# Altium PCB Altium_PCB_Layout_ThinkClamp_v0.6.1_tpreset.PcbDoc
Units mil, origin at the board's own origin, x right, y up, seen from the top; angles counter-clockwise.
Board outline 1968.5 x 1968.5 mil, 2 copper layers (Top Layer, Bottom Layer); 38 components, 52 nets, 223 pads, 32 vias.
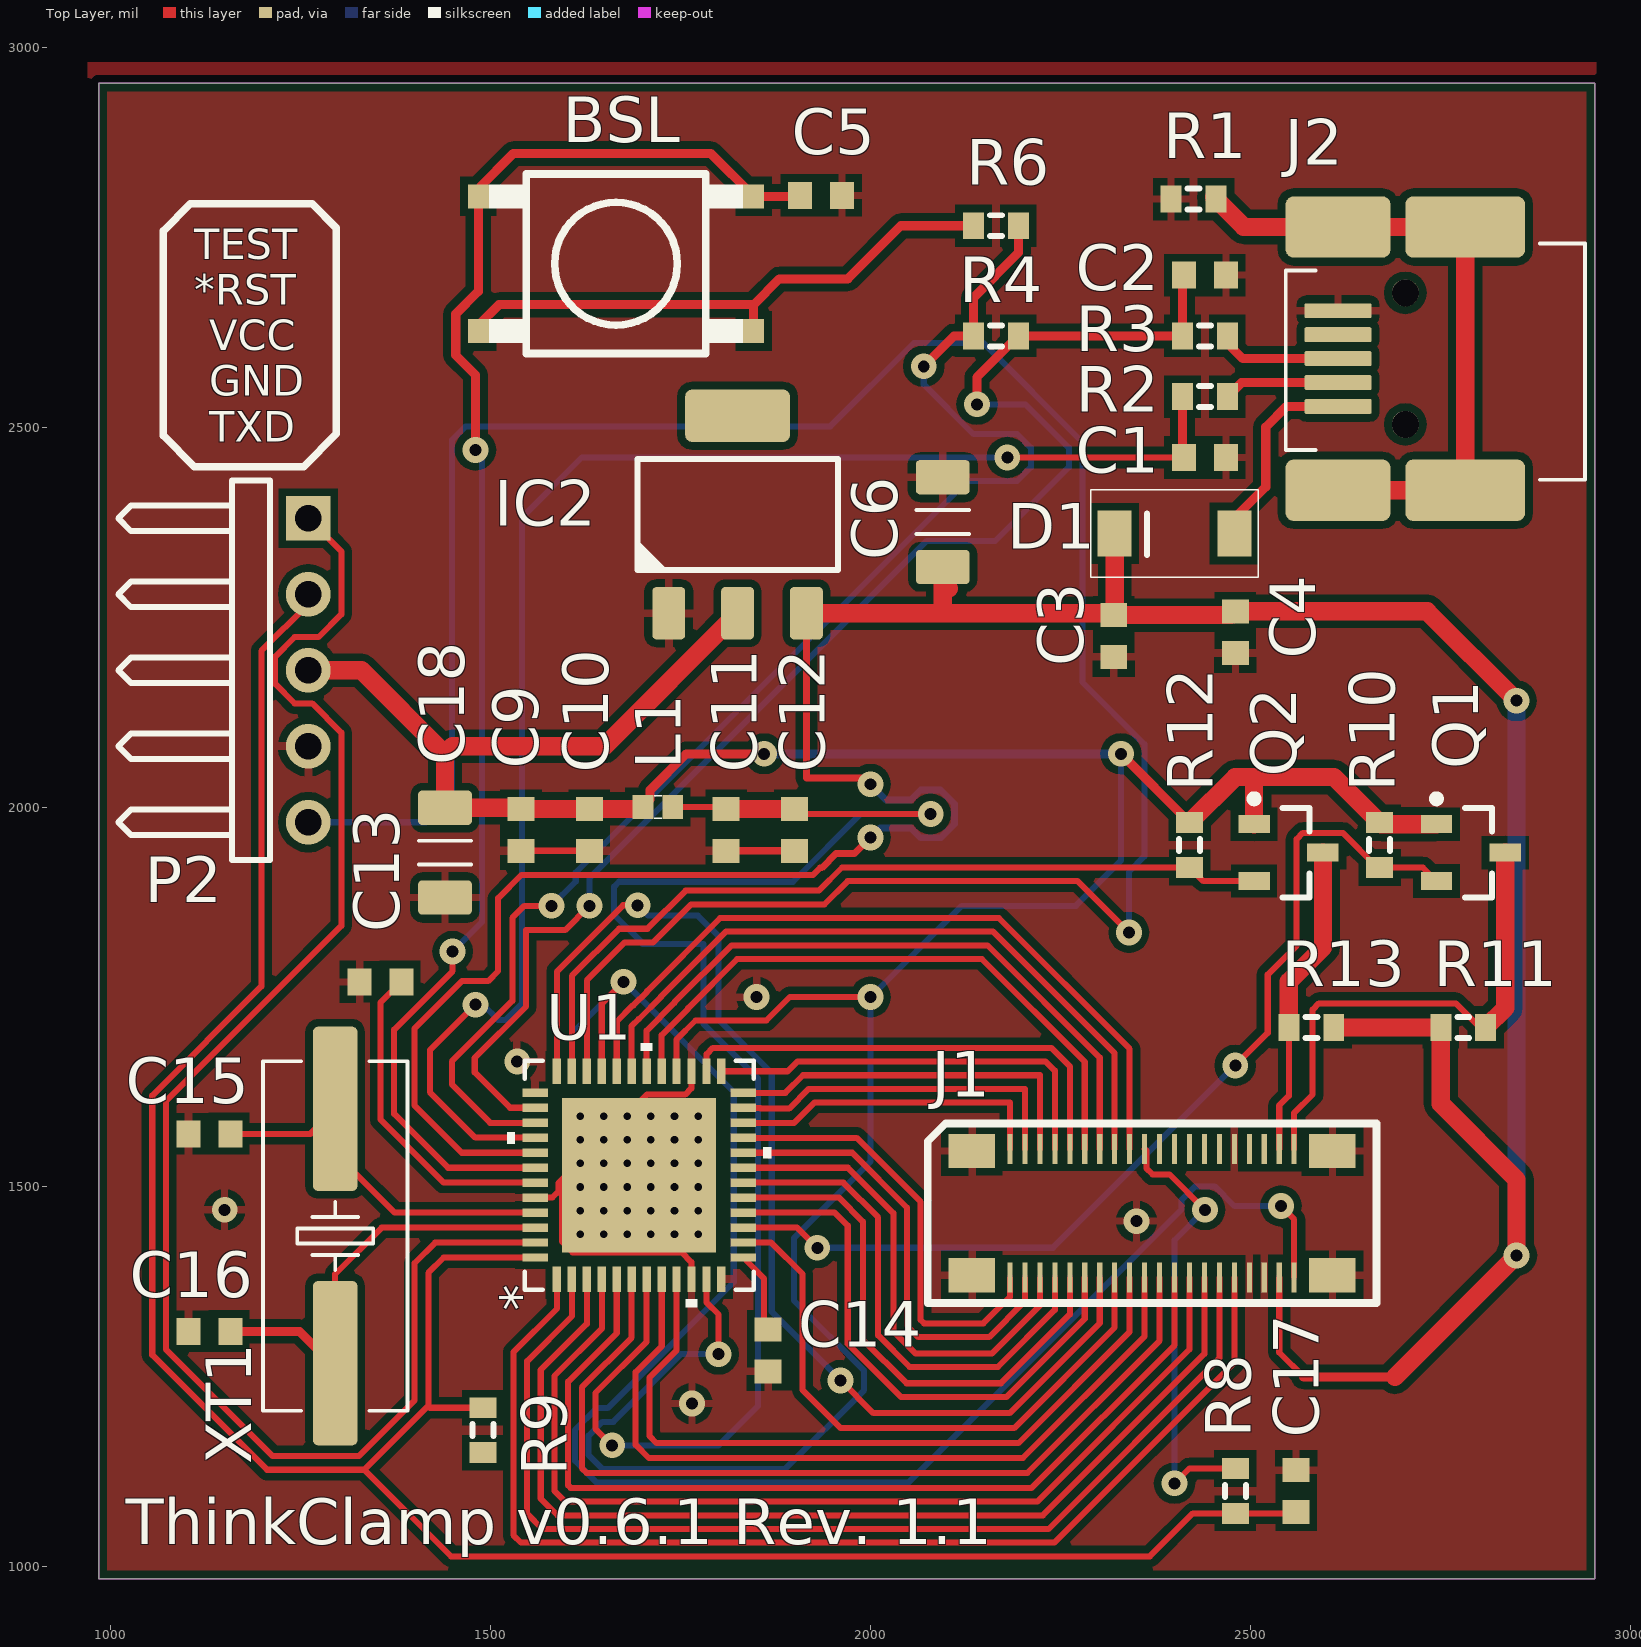
[diagram p0: Top Layer view]
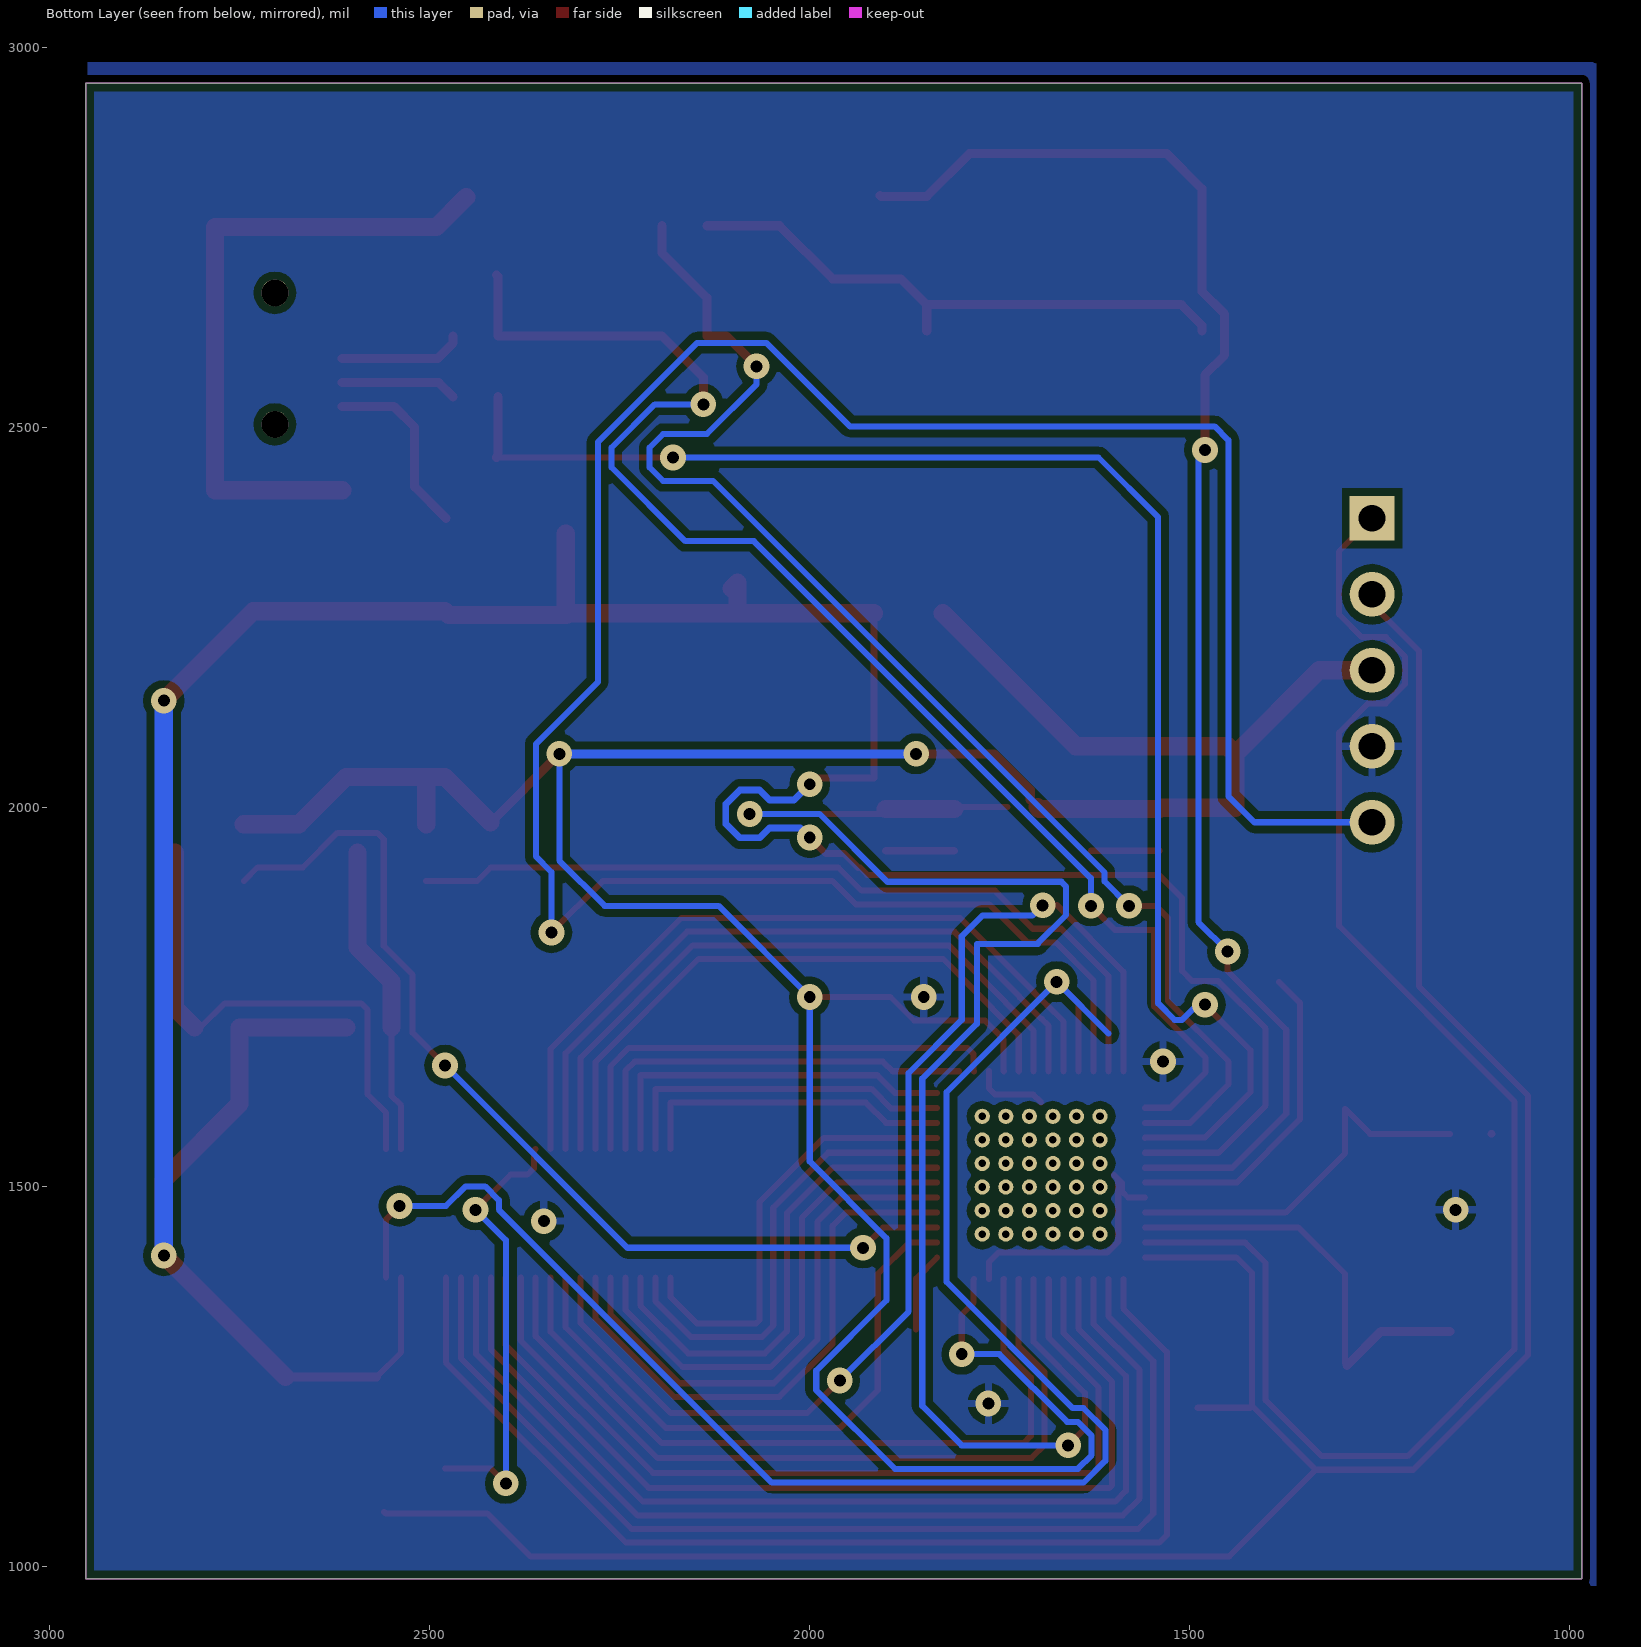
[diagram p1: Bottom Layer view, seen from below]

## Layer stack, top to bottom
Top Layer: signal copper 1.4
Dielectric: dielectric 12.6, FR-4, Dk 4.8
Bottom Layer: signal copper 1.4

## Board outline
984.25,984.25 984.25,2952.76 2952.76,2952.76 2952.76,984.25 2952.76,2952.76 984.25,2952.76 2952.76,2952.76 2952.76,984.25

## Design rules (kind name [scope] priority, off if disabled: settings)
Clearance "Clearance MSP430F5502" [HasFootprint('RGZ48_5P15X5P15') vs HasFootprint('RGZ48_5P15X5P15')] p1: gap=5
Clearance [All] p2: gap=10
PolygonConnect [All] p1: connectstyle=Relief reliefconductorwidth=10 reliefentries=4 polygonreliefangle="90 Angle" airgapwidth=10
RoutingVias [All] p1: holewidth=15.75 width=33.86 viastyle="Through Hole" minholewidth=15 minwidth=30 maxholewidth=28 maxwidth=50
ShortCircuit ShortCircuit_epad [InNet('EPAD') And OnLayer('Multi-Layer') vs InNet('EPAD') And OnLayer('Multi-Layer')] p1: allowed=TRUE
ShortCircuit [All] p2: allowed=FALSE
SolderMaskExpansion [All] p1: expansion=4
Width GND [InNet('GND')] p1: maxlimit=10 minlimit=8 preferedwidth=10
Width VCC [InNet('VCC')] p2: maxlimit=10 minlimit=10 preferedwidth=10
Width [All] p3: maxlimit=24 minlimit=8 preferedwidth=8
27 further rules are at their usual default settings.

## Components (designator, comment, footprint, x,y, rotation, side; value= is the part's Value field where it differs from the comment)
BSL "TL3301" TL3301 1665,2715 r180 top
C1 "Cap Semi" 1608[0603] 2440,2460 r180 top
C2 "Cap Semi" 1608[0603] 2440,2700 r180 top
C3 "Cap Semi" 1608[0603] 2320,2225 r270 top
C4 "Cap Semi" 1608[0603] 2480,2230 r270 top
C5 "Cap Semi" 1608[0603] 1935,2805 r180 top
C6 "approved sub OK" CAPC3216X180N 2095,2375 r90 top
C9 "Cap Semi" 1608[0603] 1540,1970 r90 top
C10 "Cap Semi" 1608[0603] 1630,1970 r90 top
C11 "Cap Semi" 1608[0603] 1810,1970 r90 top
C12 "Cap Semi" 1608[0603] 1900,1970 r90 top
C13 "Cap Semi" 1608[0603] 1355,1770 r180 top
C14 "Cap Semi" 1608[0603] 1865,1285 r270 top
C15 "Cap Semi" 1608[0603] 1130,1570 r0 top
C16 "Cap Semi" 1608[0603] 1130,1310 r0 top
C17 "Cap Semi" 1608[0603] 2560,1100 r90 top
C18 "approved sub OK" CAPC3216X180N 1440,1940 r270 top
D1 "B140-13-F" SMA 2400,2360 r180 top
IC2 "RT9164A LDO" SOT223 1825,2385 r90 top
J1 "AA01B-S040VA1" AA01B-S040VA1 2370.5,1465.5 r0 top
J2 "USB_MINI_5P" USB_Mini-B_Molex_SMT 2940,2785 r180 top
L1 "BK1608HM121-T" BK1608HM121-T 1720,2000 r0 top
P2 "Header 5H" HDR1X5H 1260,2380 r270 top
Q1 "BSS138N" INF-PG-SOT23_N 2790,1940 r0 top
Q2 "BSS138N" INF-PG-SOT23_N 2550,1940 r0 top
R1 "Res3" J1-0603 2425,2800 r0 top
R2 "Res3" J1-0603 2440,2540 r180 top
R3 "Res3" J1-0603 2440,2620 r180 top
R4 "Res3" J1-0603 2165,2620 r180 top
R6 "Res3" J1-0603 2165,2765 r0 top
R8 "Res3" J1-0603 2480,1100 r270 top
R9 "Res3" J1-0603 1490,1180 r270 top
R10 "Res3" J1-0603 2670,1950 r90 top
R11 "Res3" J1-0603 2780,1710 r180 top
R12 "Res3" J1-0603 2420,1950 r90 top
R13 "Res3" J1-0603 2580,1710 r0 top
U1 "MSP430F5502IRGZR" RGZ48_5P15X5P15 1695.5,1515.5 r90 top
XT1 "4.00MHz" CRYSTAL_HC49-US-SM 1295.5,1435.5 r270 top

## Footprints (in the part's own frame and the unit in brackets; to place one, negate y for a bottom-side part, rotate by r counter-clockwise, add the part's x,y. Pads: shape width x height; smd on the part's side, far side on the other; paste and mask are expansions set on the pad)
1608[0603] [mm] "Chip Capacitor, Body 1.6x0.8mm, IPC High Density"
  rect 0.8x0.9 smd: 1(-0.7,0) 2(0.7,0)
  body extent -0.87,-0.48 0.87,0.48, height 1.3
AA01B-S040VA1 [mm]
  rect 0.17x1 smd: 1(-4.75,2.15) 2(-4.75,-2.15) 3(-4.25,2.15) 4(-4.25,-2.15) 5(-3.75,2.15) 6(-3.75,-2.15) 7(-3.25,2.15) 8(-3.25,-2.15) 9(-2.75,2.15) 10(-2.75,-2.15) 11(-2.25,2.15) 12(-2.25,-2.15) 13(-1.75,2.15) 14(-1.75,-2.15) 15(-1.25,2.15) 16(-1.25,-2.15) 17(-0.75,2.15) 18(-0.75,-2.15) 19(-0.25,2.15) 20(-0.25,-2.15) 21(0.25,2.15) 22(0.25,-2.15) 23(0.75,2.15) 24(0.75,-2.15) 25(1.25,2.15) 26(1.25,-2.15) 27(1.75,2.15) 28(1.75,-2.15) 29(2.25,2.15) 30(2.25,-2.15) 31(2.75,2.15) 32(2.75,-2.15) 33(3.25,2.15) 34(3.25,-2.15) 35(3.75,2.15) 36(3.75,-2.15) 37(4.25,2.15) 38(4.25,-2.15) 39(4.75,2.15) 40(4.75,-2.15)
  rect 1.55x1.14 smd: 41(-6.025,2.075) 42(-6.025,-2.075) 43(6.025,2.075) 44(6.025,-2.075)
  silkscreen extent -7.5,-3 7.5,3
BK1608HM121-T [mm]
  rect 0.7x0.8 smd: 1(-0.5,0) 2(0.5,0)
  silkscreen extent -0.13,-0.38 0.13,0.38
CAPC3216X180N [mm] "Chip Capacitor, Body 3.2x1.6mm, 1.8mm H, EIA 1206, IPC Medium Density"
  round 0.508 on Mech15: 0(0,0)
  rrect25% 1.15x1.8 smd: 1(-1.5,0) 2(1.5,0)
  silkscreen extent -0.4,-0.88 0.4,0.88, body extent -1.7,-0.9 1.7,0.9, height 1.8
CRYSTAL_HC49-US-SM [mm] "SMD Crystal HC49/US-SM package"
  round 0.508 on Mech15: 0(0,0)
  rrect25% 5.5x1.5 smd: 1(-4.25,0) 2(4.25,0)
  silkscreen extent -5.84,-2.41 5.84,2.41, body extent -6.4,-2.41 6.4,2.42, height 4.29
HDR1X5H [mm] "Connector; Header; 5 Position; Right Angle"
  rect 1.5x1.5 hole 0.9: 1(0,0)
  round 1.5 hole 0.9: 2(2.54,0) 3(5.08,0) 4(7.62,0) 5(10.16,0)
  silkscreen extent -1.27,-6.35 11.43,-1.27
INF-PG-SOT23_N [mm] "SOT23, 3-Leads, Body 2.9x1.3mm, Pitch 0.95mm, IPC Medium Density"
  rect 1.05x0.6 smd: 1(-1.15,0.95) 2(-1.15,-0.95) 3(1.15,0)
  silkscreen extent -1.27,-1.5 0.7,1.92, body extent -0.7,-1.5 0.7,1.5, height 1.1
J1-0603 [mm] "Chip Resistor, Body 1.6x0.8mm, IPC High Density"
  rect 0.7x0.9 smd: 1(-0.75,0) 2(0.75,0)
  silkscreen extent -0.2,-0.35 0.2,0.35, body extent -0.85,-0.48 0.85,0.48, height 0.9
RGZ48_5P15X5P15 [mil]
  rect 33.46x11.02 smd paste-5.51: 1(-136.81,108.27) 2(-136.81,88.58) 3(-136.81,68.9) 4(-136.81,49.21) 5(-136.81,29.53) 6(-136.81,9.84) 7(-136.81,-9.84) 8(-136.81,-29.53) 9(-136.81,-49.21) 10(-136.81,-68.9) 11(-136.81,-88.58) 12(-136.81,-108.27) 25(136.81,-108.27) 26(136.81,-88.58) 27(136.81,-68.9) 28(136.81,-49.21) 29(136.81,-29.53) 30(136.81,-9.84) 31(136.81,9.84) 32(136.81,29.53) 33(136.81,49.21) 34(136.81,68.9) 35(136.81,88.58) 36(136.81,108.27)
  rect 11.02x33.46 smd paste-5.51: 13(-108.3,-136.81) 14(-88.61,-136.81) 15(-68.91,-136.81) 16(-49.22,-136.81) 17(-29.54,-136.81) 18(-9.85,-136.81) 19(9.85,-136.81) 20(29.54,-136.81) 21(49.22,-136.81) 22(68.91,-136.81) 23(88.61,-136.81) 24(108.3,-136.81) 37(108.3,136.81) 38(88.61,136.81) 39(68.91,136.81) 40(49.22,136.81) 41(29.54,136.81) 42(9.85,136.81) 43(-9.85,136.81) 44(-29.54,136.81) 45(-49.22,136.81) 46(-68.91,136.81) 47(-88.61,136.81) 48(-108.3,136.81)
  rect 202.76x202.76 smd paste-100.88 mask-101: 49(0,0)
  round 20 / inner round 60 / far side round 20 hole 10: V(77.5,77.5) V_2(-77.5,-46.5) V_3(-77.5,-77.5) V_4(-77.5,-15.5) V_5(-77.5,15.5) V_6(-77.5,46.5) V_7(-77.5,77.5) V_8(-46.5,-77.5) V_9(-46.5,-46.5) V_10(-46.5,-15.5) V_11(-46.5,15.5) V_12(-46.5,46.5) V_13(-46.5,77.5) V_14(-15.5,-77.5) V_15(-15.5,-46.5) V_16(-15.5,-15.5) V_17(-15.5,15.5) V_18(-15.5,46.5) V_19(-15.5,77.5) V_20(15.5,-77.5) V_21(15.5,-46.5) V_22(15.5,-15.5) V_23(15.5,15.5) V_24(15.5,46.5) V_25(15.5,77.5) V_26(46.5,-77.5) V_27(46.5,-46.5) V_28(46.5,-15.5) V_29(46.5,15.5) V_30(46.5,46.5) V_31(46.5,77.5) V_32(77.5,-77.5) V_33(77.5,-46.5) V_34(77.5,-15.5) V_35(77.5,15.5) V_36(77.5,46.5)
  silkscreen extent -174,-174 174,174
SMA [mm]
  rect 1.14x1.55 smd: 1(-2,0) 2(2,0)
  silkscreen extent -2.8,-1.46 2.8,1.46
SOT223 [mm] "SOT223 /SC-73"
  round 1 on Mech15: 0(0,0)
  rrect25% 1.75x1.1 smd: 1(-3.3,2.3) 2(-3.3,0) 3(-3.3,-2.3)
  rrect25% 1.75x3.5 smd: 4(3.3,0)
  silkscreen extent -1.85,-3.35 1.85,3.35, body extent -3.65,-3.35 3.65,3.35, height 1.8
TL3301 [mm] "TL3301, Tactile switch"
  rect 0.7x0.8 smd: 1(-4.6,2.25) 2(4.6,2.25) 3(-4.6,-2.25) 4(4.6,-2.25)
  silkscreen extent -4.25,-3 4.25,3
USB_Mini-B_Molex_SMT [mm]
  rrect25% 2.25x0.5 smd: 1(8.25,6.55) 2(8.25,5.75) 3(8.25,4.95) 4(8.25,4.15) 5(8.25,3.35)
  round 0.9 hole 0.9 unplated: H1(6,7.15) H2(6,2.75)
  rrect25% 4x2.05 smd: MH1(4,0.55) MH4(4,9.35)
  rrect25% 3.5x2.05 smd: MH2(8.25,0.55) MH3(8.25,9.35)
  silkscreen extent 0,1.1 10,9, body extent 0,1.1 9,9, height 3.95

## Part data
BSL: "TL3301, tactile switch, gull wing termination"
C1 C2 C3 C4 C5 C9 C10 C11 C12 C13 C14 C15 C16 C17: "Capacitor (Semiconductor SIM Model)"
C6: library part CAPC_10u_1206_16V, "Capacitor SMD Cer 10uF 10% 16V X7R 1206"
C18: library part CAPC_10u_1206_10V, "Capacitor SMD Cer 10uF 10% 10V X5R 1206"
D1: "B140-13-F, Schottky Diode"
IC2: "RT9164-33[P/G]G, 3.3V, LDO"
J1: "AA01B-S040VA1, LAPTOP KEYBOARD RECEPTACLE"
J2: "Mini USB Connector"
L1: "BK1608HM121, Multilayer Chip Bead Inductor"
P2: "Header, 5-Pin, Right Angle"
Q1 Q2: "N-Channel SIPMOS Small-Signal-Transistor, 60 V VDS, 0.23 A ID, -55 to 150 degC, PG-SOT23, Reel, Green"
R1 R2 R3 R4 R6 R8 R9 R10 R11 R12 R13: "Resistor"
U1: library part MSP430F5502_RGZ_, "MSP430F5502, QFN, 48-pin"
XT1: library part Crystal_6MHz_HC49/US, "Resonator Ceramic 4.00 MHz 30ppm"

## Via types
v1: diameter 33.86, hole 15.75, Top Layer to Bottom Layer, 32 vias

## Nets (pads, with @x,y where several pads share a name; then routed paths per layer and width w, separated by ;. In a path a pad name is that pad's centre, name@x,y a point inside that pad or via, vN(x,y) a via of type N, cw(c..) or ccw(c..) an arc to the next point about the centre after c; other vN are vias at no path point)
*RST: C17.1 P2.2 R8.2 R9.1 U1.48 | length 3241.2
  Top Layer w8: P2.2 1260,2267.01 1198.47,2205.49 1198.47,1763.93 1054.69,1620.15 1054.69,1279.03 1205.81,1127.91 1333.96,1127.91 ; R9.1 1420.42,1209.53 1418,1211.95 ; U1.48 1438.31,1407.2 1418,1386.89 1418,1211.95 ; C17.1 2558.03,1070.47 R8.2 2424.21,1070.47 2367.7,1013.96 1447.9,1013.96 1333.96,1127.91 ; 1333.96,1127.91 1418,1211.95
EPAD: C1.1 C2.1 C3.2 C4.2 C5.1 C6.2 C9.1 C10.1 C11.1 C12.1 C13.2 C14.2 C15.1 C16.1 C17.2 C18.2 IC2.1 J1.31 J1.34 J1.36 J1.41 J1.42 J1.43 J1.44 J2.5 P2.4 R1.1 U1.10 U1.12 U1.27 U1.37 U1.44 U1.49 | length 624.7
  Top Layer w8: C9.1 C10.1 ; U1.44 1558.87,1486.14 1581.22,1486.14 1589.42,1494.34 1589.42,1505.36 1594,1509.94 ; U1.49@1599.56,1515.5 1594,1509.94 ; U1.49@1695.5,1611.44 1705.64,1621.58 1756.02,1621.58 1764.22,1629.78 1764.22,1652.14 U1.27 ; U1.10 1764.22,1378.86 1764.22,1401.22 1751.44,1414 1608.06,1414 1594,1428.06 1594,1509.94
  Top Layer w10: C15.1 C15.1@1102.88,1570 ; C11.1 C12.1
  other v1: 1765,1215 2350,1455 1150,1470 1535,1665 1850,1750
NetBSL_1: BSL.1 BSL.2 R6.1 | length 748
  Top Layer w12: BSL.2 1483.9,2633.9 1511.1,2661.1 1846.1,2661.1 ; BSL.1 1846.1,2661.1 ; R6.1 2040,2765 1970,2695 1880,2695 1846.1,2661.1
NetBSL_3: BSL.3 BSL.4 C5.2 U1.42 | length 1973.7
  Top Layer w8: v1(1450,1810) 1450,1784.18 1373,1707.18 1373,1596.35 1444,1525.35 U1.42
  Top Layer w12: v1(1480,2470) 1480,2568.79 1454.12,2594.67 1454.12,2648.79 1483.9,2678.57 BSL.4 1483.9,2813.9 1530,2860 1789.69,2860 BSL.3 1906.02,2803.58 C5.2
  Bottom Layer w8: v1(1450,1810) 1488.55,1848.55 1488.55,2461.45 v1(1480,2470)
NetC1_2: C1.2 R2.2 U1.40 | length 2006.5
  Top Layer w8: v1(1480,1740) 1420,1680 1420,1624.9 1480,1564.9 1558.51,1564.9 U1.40 ; v1(2180,2460) 2230,2460 C1.2
  Top Layer w12: R2.2 2410.47,2461.97 C1.2
  Bottom Layer w8: v1(1480,1740) 1490,1740 1510,1720 1520,1720 1541.57,1741.57 1541.57,2381.57 1620,2460 v1(2180,2460)
NetC2_2: C2.2 R3.2 R4.1 U1.38 | length 1881.5
  Top Layer w8: U1.38 1558.51,1604.28 1525.72,1604.28 1479.14,1650.86 1479.14,1669.94 1546.74,1737.54 1546.74,1838 1598,1838 v1(1630,1870)
  Top Layer w12: v1(2140,2530) 2140,2565.47 R4.1 R3.2 2410.47,2698.03 C2.2
  Bottom Layer w8: v1(1630,1870) 1630,1906.43 2073.57,2350 2163.74,2350 2260.93,2447.19 2260.93,2472.81 2203.74,2530 v1(2140,2530)
NetC3_1: C3.1 C4.1 C6.1 D1.2 IC2.3 J1.38 R11.2 R13.2 U1.41 | length 4484.6
  Top Layer w8: U1.41 1462,1545.04 1400,1607.04 1400,1708.72 1462.21,1770.93 1496.67,1770.93 1510,1784.26 1510,1880 1540.69,1910.69 1924.34,1910.69 1933.72,1920.07 ; J1.38 2537.82,1282.18 2570,1250
  Top Layer w9: IC2.3 1915.55,2038.1 1991.9,2038.1 v1(2000,2030) ; 1933.72,1920.07 1935.84,1920.07 1954.74,1938.97 1978.97,1938.97 v1(2000,1960)
  Top Layer w12: 2570,1250 2690,1250
  Top Layer w24: IC2.3 2094.92,2255.08 ; 2102.88,2287.56 2095,2295.44 2094.92,2295.36 2094.92,2255.08 ; D1.2 2321.26,2258.86 C3.1@2317.48,2255.08 ; R13.2 R11.2 2750.47,1609.53 2850,1510 v1(2850,1410) 2690,1250 ; v1(2850,2140) 2732.44,2257.56 C4.1 2475,2252.56 C3.1 C3.1@2317.48,2255.08 ; 2094.92,2255.08 C3.1@2317.48,2255.08
  Bottom Layer w9: v1(2000,1960) 2012.43,1972.43 2053.12,1972.43 2066.05,1959.5 2092.09,1959.5 2110.5,1977.91 2110.5,2003.95 2092.09,2022.36 2066.05,2022.36 2053.12,2009.43 2020.57,2009.43 v1(2000,2030)
  Bottom Layer w24: v1(2850,1410) v1(2850,2140)
NetC9_2: C9.2 C10.2 C18.1 IC2.2 L1.1 P2.3 Q1.1 Q2.1 R10.2 R12.2 U1.11 U1.28 | length 4488.3
  Top Layer w8: U1.28 1744.89,1652.48 1744.89,1694.32 1769.63,1719.07 1862.81,1719.07 1893.74,1750 v1(2000,1750) ; U1.11 1784.26,1378.52 1784.26,1347.96 1800,1332.21 1800,1290 1790,1280 v1(1800,1280)
  Top Layer w12: L1.1 1709.91,2009.59 1709.91,2022.38 1757.53,2070 v1(1860,2070) ; v1(2329.53,2070) R12.2
  Top Layer w24: P2.3 1330,2180 1440,2070 ; L1.1 1697.87,1997.56 C10.2 C9.2 1538.5,1999.06 C18.1 1440,2070 ; IC2.2 1649.92,2080 1450,2080 1440,2070 ; R12.2 2480,2039.53 2500,2039.53 ; Q2.1 2504.72,2034.8 2500,2039.53 ; Q1.1 2672.13,1977.4 R10.2 2610,2039.53 2500,2039.53
  Bottom Layer w8: v1(1800,1280) 1750.46,1280 1661.38,1190.93 1647.19,1190.93 1629.07,1172.81 1629.07,1147.19 1647.19,1129.07 1887.81,1129.07 1991.43,1232.69 1991.43,1258.31 1899.07,1350.67 1899.07,1432.81 2000,1533.74 v1(2000,1750) 2120,1870 2270,1870 2329.53,1929.53 v1(2329.53,2070)
  Bottom Layer w12: v1(1860,2070) v1(2329.53,2070)
NetC11_2: C11.2 C12.2 L1.2 U1.7 | length 2077.1
  Top Layer w8: v1(1660,1160) 1638,1182 1638,1228.91 1705.34,1296.25 U1.7 ; L1.2 1807.56,2000 C11.2 ; C12.2 1906.63,1990.93 v1(2079.07,1990.93)
  Top Layer w24: C11.2 C12.2
  Bottom Layer w8: v1(1660,1160) 1800,1160 1852,1212 1852,1642.54 1780,1714.54 1780,1819.54 1700,1819.54 1700,1820.52 1662.59,1857.93 1662.59,1895.29 1668.98,1901.67 1897.93,1901.67 1987.19,1990.93 v1(2079.07,1990.93)
NetC13_1: C13.1 U1.43 | length 430.7
  Top Layer w8: C13.1 1355,1742.44 1355,1588.89 1438.06,1505.83 1558.51,1505.83 U1.43
NetC14_1: C14.1 U1.13 | length 106.1
  Top Layer w8: U1.13 1860,1379.52 C14.1@1860,1312.56
NetC15_2: C15.2 U1.45 XT1.1 | length 505.5
  Top Layer w8: C15.2 1262.68,1570 XT1.1 1295.5,1544.5 1373.72,1466.28 U1.45
NetC16_2: C16.2 U1.46 XT1.2 | length 563.3
  Top Layer w8: XT1.2@1292.82,1265.5 XT1.2 1295.5,1385.5 1356.59,1446.59 U1.46
  Top Layer w12: C16.2 1248.32,1310 XT1.2@1292.82,1265.5
NetD1_1: D1.1 J2.1 | length 243.5
  Top Layer w12: D1.1@2478.74,2380 2520,2421.26 2520,2500 2547.13,2527.13 J2.1
NetJ1_1: J1.1 U1.22 | length 423.1
  Top Layer w8: U1.22 1899.41,1584.41 1926.04,1611.04 2183.49,1611.04 J1.1
NetJ1_2: J1.2 U1.21 | length 583.2
  Top Layer w8: U1.21 1981.65,1564.72 2066,1480.37 2066,1325 2070.5,1320.5 2148.49,1320.5 2183.49,1355.5 J1.2
NetJ1_3: J1.3 U1.23 | length 460.8
  Top Layer w8: U1.23 1832.49,1603.93 1854.84,1603.93 1855.54,1603.23 1892.77,1603.23 1918.59,1629.04 2203.18,1629.04 J1.3
NetJ1_4: J1.4 U1.20 | length 613
  Top Layer w8: U1.20 1975.88,1545.04 2048,1472.92 2048,1317.54 2063.04,1302.5 2155.95,1302.5 2203.18,1349.73 J1.4
NetJ1_5: J1.5 U1.24 | length 497.1
  Top Layer w8: U1.24 1887.88,1623.8 1911.13,1647.04 2222.86,1647.04 J1.5
NetJ1_6: J1.6 U1.19 | length 645.6
  Top Layer w8: U1.19 1970.12,1525.35 2030,1465.46 2030,1310.09 2058.96,1281.13 2160.03,1281.13 2222.86,1343.96 J1.6
NetJ1_7: J1.7 U1.25 | length 551.9
  Top Layer w8: U1.25 1890.94,1652.31 1903.68,1665.04 2230.5,1665.04 2242.55,1653 J1.7
NetJ1_8: J1.8 U1.18 | length 675.5
  Top Layer w8: U1.18 1964.35,1505.65 2010,1460.01 2010,1304.63 2051.5,1263.13 2167.49,1263.13 2242.55,1338.19 J1.8
NetJ1_9: J1.9 U1.26 | length 622.7
  Top Layer w8: U1.26 1784.26,1652.48 1784.26,1674.84 1792.46,1683.04 2237.96,1683.04 2262.23,1658.77 J1.9
NetJ1_10: J1.10 U1.17 | length 708.1
  Top Layer w8: U1.17 1958.59,1485.96 1990,1454.55 1990,1299.18 2047.42,1241.76 2171.58,1241.76 2262.23,1332.42 J1.10
NetJ1_11: J1.11 U1.29 | length 816.8
  Top Layer w8: U1.29 1725.03,1699.92 1759.93,1734.82 1759.93,1735.38 1824.54,1800 2146.46,1800 2281.92,1664.54 J1.11
NetJ1_12: J1.12 U1.16 | length 737.9
  Top Layer w8: U1.16 1952.82,1466.28 1970,1449.09 1970,1293.72 2039.96,1223.76 2179.03,1223.76 2281.92,1326.65 J1.12
NetJ1_13: J1.13 U1.30 | length 877.8
  Top Layer w8: U1.30 1705.34,1705.69 1741.93,1742.28 1741.93,1742.84 1817.09,1818 2153.91,1818 2301.6,1670.31 J1.13
NetJ1_14: J1.14 U1.36 | length 1516.2
  Top Layer w8: U1.36@1587.41,1652.48 U1.36 1587.23,1783.49 1674.48,1870.74 v1(1693.52,1870.74) ; v1(1960.5,1245.5) 2003.61,1202.39 2183.12,1202.39 2301.6,1320.88 J1.14
  Bottom Layer w8: v1(1693.52,1870.74) 1707.1,1857.16 1772.84,1857.16 1800,1830 1800,1720 1870,1650 1870,1336 v1(1960.5,1245.5)
NetJ1_15: J1.15 U1.31 | length 939.2
  Top Layer w8: U1.31 1685.66,1712.02 1694.7,1721.07 1695.27,1721.07 1723.93,1749.73 1723.93,1750.3 1809.63,1836 2161.37,1836 2321.29,1676.08 J1.15
NetJ1_16: J1.16 U1.14 | length 800.2
  Top Layer w8: U1.14 1869.11,1426.89 1910.5,1385.5 1910.5,1232.7 1960.5,1182.7 2188.89,1182.7 2321.29,1315.1 J1.16
NetJ1_17: J1.17 U1.32 | length 1000.2
  Top Layer w8: U1.32 1665.97,1717.8 1687.25,1739.07 1687.81,1739.07 1705.93,1757.19 1705.93,1757.75 1802.18,1854 2168.82,1854 2340.97,1681.85 J1.17
NetJ1_18: J1.18 U1.9 | length 989.3
  Top Layer w8: U1.9 1744.89,1378.52 1744.89,1284.89 1708.93,1248.93 1708.93,1172.41 1718.31,1163.02 2194.66,1163.02 2340.97,1309.33 J1.18
NetJ1_19: J1.19 R8.1 | length 590.8
  Top Layer w8: J1.19 2363,1547.81 2363,1524.66 2371.2,1516.46 2393.54,1516.46 v1(2440,1470) ; v1(2400,1110) 2419.53,1129.53 R8.1
  Bottom Layer w8: v1(2400,1110) 2400,1430 v1(2440,1470)
NetJ1_20: J1.20 U1.8 | length 1052.8
  Top Layer w8: U1.8 1725.2,1378.52 1725.2,1290.66 1690.93,1256.38 1690.93,1160.72 1708.32,1143.33 2200.43,1143.33 2360.66,1303.56 J1.20
NetJ1_22: J1.22 U1.6 | length 1194.1
  Top Layer w8: U1.6 1685.5,1378.53 1685.5,1301.87 1620,1236.37 1620,1130 1626.35,1123.65 2206.2,1123.65 2380.34,1297.79 J1.22
NetJ1_24: J1.24 U1.5 | length 1263.9
  Top Layer w8: U1.5 1665.97,1307.8 1602,1243.82 1602,1107.46 1605.49,1103.96 2211.97,1103.96 2400.03,1292.02 J1.24
NetJ1_26: J1.26 U1.4 | length 1323.7
  Top Layer w8: U1.4 1646.46,1378.52 1646.46,1313.74 1584,1251.28 1584,1100 1598.04,1085.96 2219.43,1085.96 2419.71,1286.25 J1.26
NetJ1_28: J1.28 U1.3 | length 1384.9
  Top Layer w8: U1.3 1626.78,1378.52 1626.78,1320 1566,1259.22 1566,1090 1588.04,1067.96 2226.88,1067.96 2439.4,1280.48 J1.28
NetJ1_30: J1.30 U1.2 | length 1451.9
  Top Layer w8: U1.2 1607.09,1378.52 1607.09,1330 1548,1270.91 1548,1070 1568.04,1049.96 2234.34,1049.96 2459.08,1274.71 J1.30
NetJ1_32: J1.32 U1.1 | length 1523.6
  Top Layer w8: U1.1 1587.41,1378.52 1587.41,1340 1530,1282.59 1530,1041.96 1540,1031.96 2241.79,1031.96 2478.77,1268.94 J1.32
NetJ1_37: J1.37 Q2.3 R13.1 | length 413.7
  Top Layer w8: J1.37 2537.82,1607.35 2550.47,1620 R13.1
  Top Layer w24: R13.1 2550.47,1770.47 2595.28,1815.28 Q2.3
NetJ1_39: J1.39 Q1.3 R11.1 | length 678.4
  Top Layer w8: J1.39 2557.51,1597.51 2581.75,1621.75 2581.75,1733.52 2589.95,1741.72 2738.28,1741.72 2770.05,1741.72 2801.77,1710 R11.1
  Top Layer w24: R11.1 2835.28,1735.75 Q1.3
NetJ1_40: J1.40 U1.33 | length 2256.8
  Top Layer w8: U1.33 1646.29,1741.29 v1(1675,1770) ; v1(2540,1475) 2557.51,1457.49 J1.40 ; v1(1675,1770) 1675,1775 1680,1780 1680,1775 v1(1675,1770)
  Bottom Layer w8: 1607,1702 v1(1675,1770) 1820,1625 1820,1375 1653.93,1208.93 1639.73,1208.93 1611.07,1180.27 1611.07,1139.73 1639.73,1111.07 2049.81,1111.07 2409.07,1470.33 2409.07,1482.81 2427.19,1500.93 2452.81,1500.93 2478.74,1475 v1(2540,1475)
NetJ2_2: J2.2 R2.1 | length 153.4
  Top Layer w12: R2.1 2488.15,2558.62 J2.2
NetJ2_3: J2.3 R3.1 | length 163.6
  Top Layer w12: R3.1 2469.53,2610.47 2489.88,2590.12 J2.3
NetJ2_MH1: J2.MH1 J2.MH2 J2.MH3 J2.MH4 R1.2 | length 860.5
  Top Layer w24: R1.2@2452.03,2802.5 2491.18,2763.35 J2.MH2 J2.MH1 J2.MH4 J2.MH3
NetP2_5: P2.5 U1.34 | length 3211.5
  Top Layer w8: U1.34 1626.6,1771.95 1676.46,1821.81 1713.79,1821.81 1763.98,1872 1939.39,1872 1969.86,1902.47 2272.53,1902.47 v1(2340,1835)
  Bottom Layer w8: P2.5 1415,1980 1449.07,2014.07 1449.07,2482.81 1467.19,2500.93 1947.19,2500.93 2057.19,2610.93 2148.27,2610.93 2278.93,2480.27 2278.93,2164.34 2360.46,2082.81 2360.46,1935 2340,1914.54 v1(2340,1835)
NetQ1_2: Q1.2 R10.1 U1.15 | length 1303
  Top Layer w8: U1.15 1903.41,1446.59 v1(1930,1420) ; v1(2480,1660) 2522.69,1702.69 2522.69,1779.46 2560.61,1817.38 2560.61,1957.61 2569,1966 2621.55,1966 2667.08,1920.47 R10.1 2726.85,1920.47 Q1.2
  Bottom Layer w8: v1(1930,1420) 2240,1420 v1(2480,1660)
NetQ2_2: Q2.2 R12.1 U1.35 | length 1089.8
  Top Layer w8: U1.35 1606.92,1777.72 1669.01,1839.81 1706.33,1839.81 1756.52,1890 1931.94,1890 1962.41,1920.47 R12.1 2437.87,1902.6 Q2.2
NetR4_2: R4.2 R6.2 U1.39 | length 1794.1
  Top Layer w8: U1.39 1499.51,1584.41 1448.93,1635 1448.93,1665.19 1528.74,1745 1528.74,1854.2 1544.54,1870 v1(1580,1870)
  Top Layer w12: v1(2070,2580) 2110,2620 R4.2 2135.47,2670.47 2194.53,2729.53 R6.2
  Bottom Layer w8: v1(1580,1870) 1612,1902 1612,1913.89 2127.18,2429.07 2192.81,2429.07 2210.93,2447.19 2210.93,2472.81 2192.81,2490.93 2135.33,2490.93 2070,2556.26 v1(2070,2580)
TEST: P2.1 U1.47 | length 2077.7
  Top Layer w8: P2.1 1303.53,2336.47 1303.53,2253.53 1273.53,2223.53 1241.97,2223.53 1216.47,2198.03 1216.47,2161.97 1241.97,2136.47 1265.08,2136.47 1303.53,2098.03 1303.53,1843.53 1072.69,1612.69 1072.69,1286.48 1213.27,1145.91 1326.5,1145.91 1400,1219.41 1400,1400 1426.89,1426.89 U1.47
VCC: R9.2
pads on no net: C6.0 C18.0 IC2.0 IC2.4 J1.21 J1.23 J1.25 J1.27 J1.29 J1.33 J1.35 J2.4 J2.H1 J2.H2 U1.V U1.V_2 U1.V_3 U1.V_4 U1.V_5 U1.V_6 U1.V_7 U1.V_8 U1.V_9 U1.V_10 U1.V_11 U1.V_12 U1.V_13 U1.V_14 U1.V_15 U1.V_16 U1.V_17 U1.V_18 U1.V_19 U1.V_20 U1.V_21 U1.V_22 U1.V_23 U1.V_24 U1.V_25 U1.V_26 U1.V_27 U1.V_28 U1.V_29 U1.V_30 U1.V_31 U1.V_32 U1.V_33 U1.V_34 U1.V_35 U1.V_36 XT1.0

## Polygon pours and split planes (outlines as drawn)
EPAD on Top Layer "Top GND" (solid, pour order 8): 965,2980 2955,2980 2955,980 2970,965 2960,975 970,975 970,2980
EPAD on Bottom Layer "Bot GND" (solid, pour order 10): 965,2985 970,2980 2950,2980 2950,970 2945,975 965,975 965,2980 955,2990

## Keep-outs
Keep-Out Layer:
  lines w1.97: 984.25,984.25 2952.76,984.25 2952.76,2952.76 984.25,2952.76 984.25,984.25

## Silkscreen, mask and mechanical layers (free items; w line width, h text height)
Top Overlay:
  lines w10: 1069,2489 1110,2448 1254,2448 1297,2491 1297,2762 1265,2794 1105,2794 1069,2758 1069,2489
  text "TEST" at 1110,2721 h40
  text "*RST" at 1110,2661 h40
  text "VCC" at 1130,2601 h40
  text "GND" at 1130,2541 h40
  text "TXD" at 1130,2481 h40
  text "ThinkClamp v0.6.1 Rev. 1.1" at 1020,1030 h60
Mechanical 4:
  lines w1.97: 984.25,984.25 2952.76,984.25 2952.76,2952.76 984.25,2952.76 984.25,984.25

## Text inside footprints (layer, text, board x,y; h text height)
U1: Top Overlay "*" at 1562.39,1336.96 h50 r90; Mechanical 1 "*" at 1562.39,1336.96 h50 r90